# Altium PCB Hotels_Lock_Main_V1.PcbDoc (part 2 of 2)
Units mil, origin at the board's own origin, x right, y up, seen from the top; angles counter-clockwise.
Board outline 2496.06 x 2220.47 mil, 2 copper layers (Top Layer, Bottom Layer); 99 components, 77 nets, 283 pads, 104 vias.
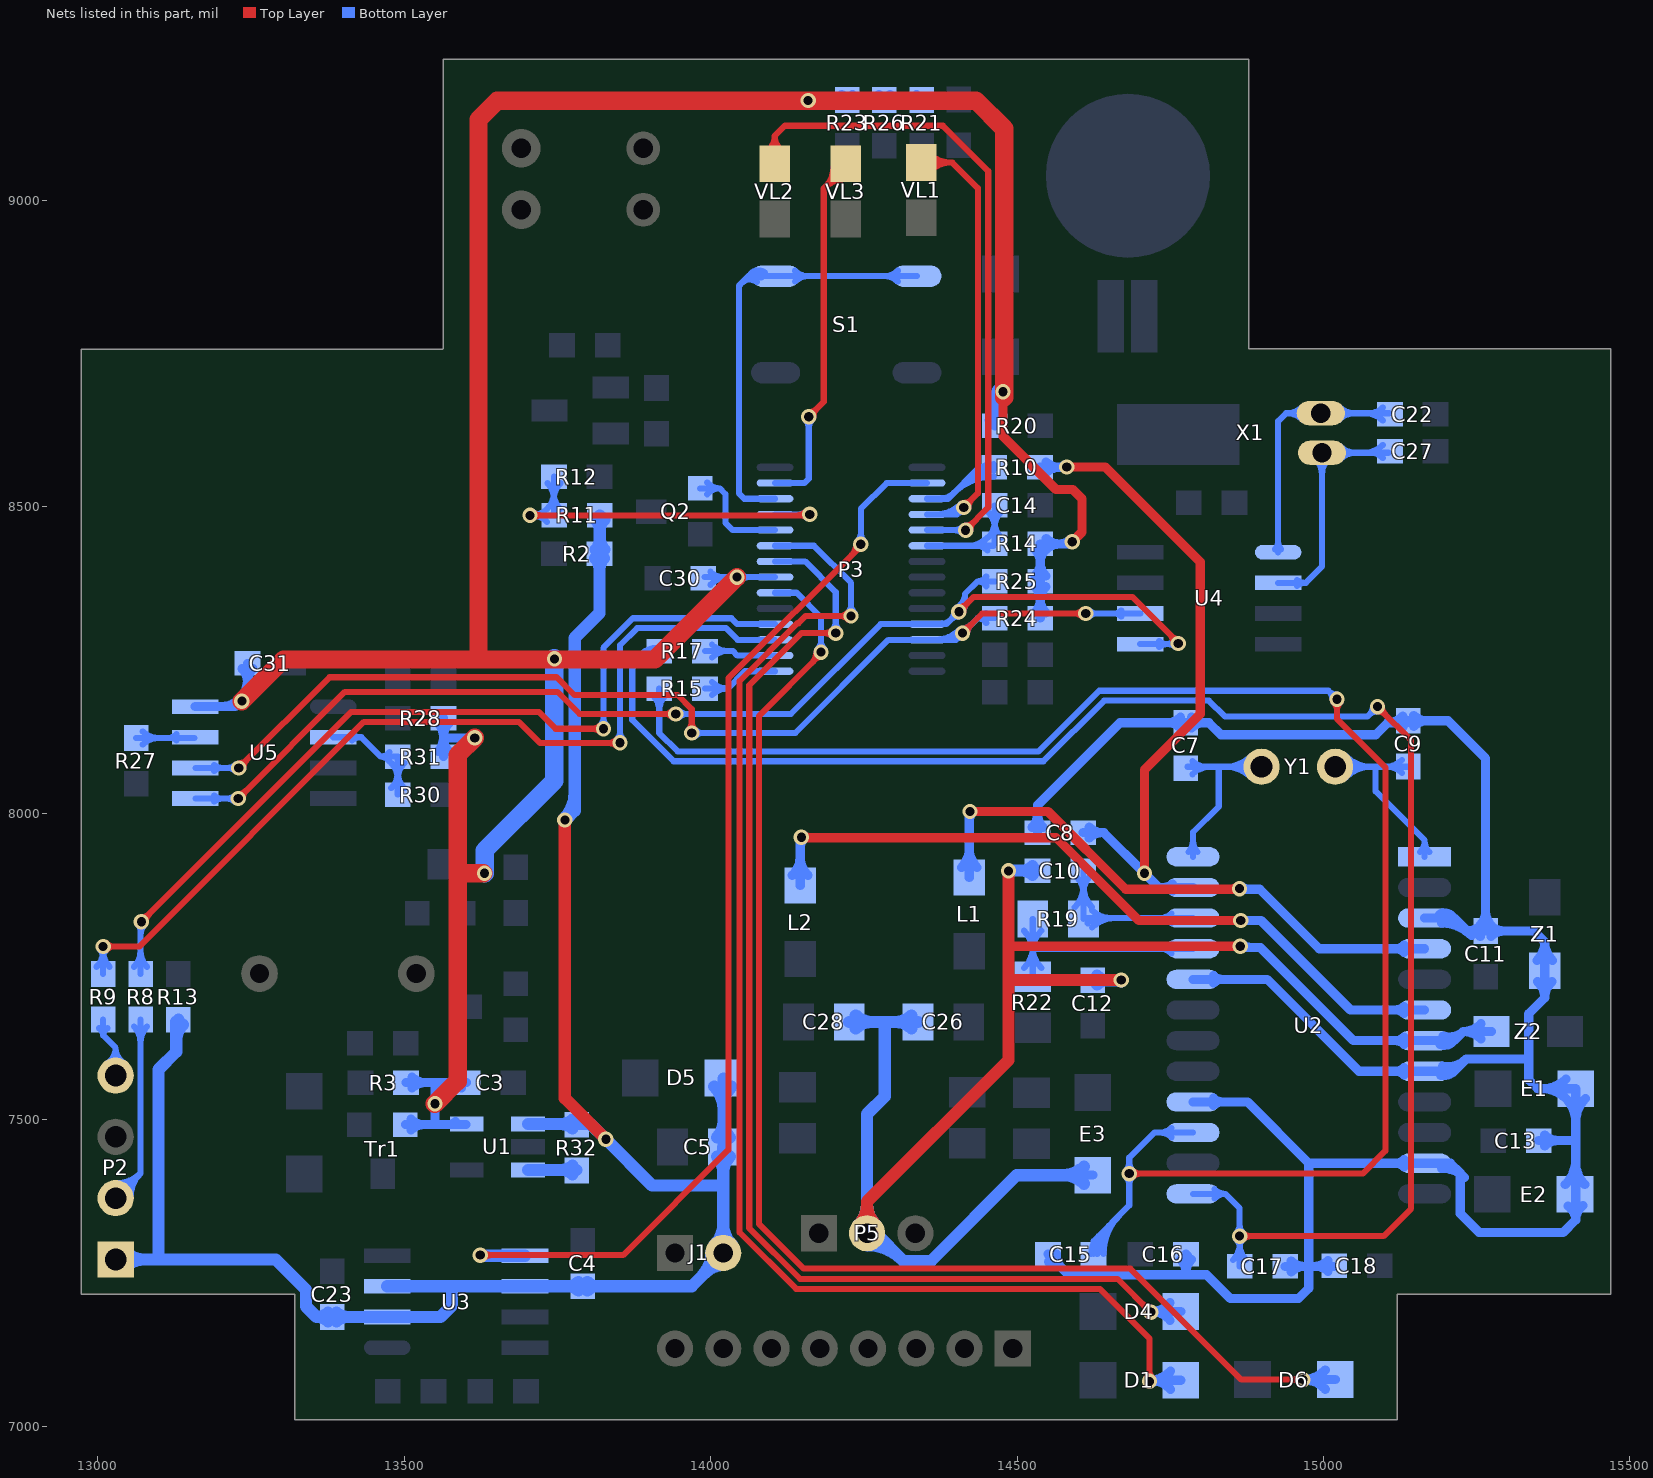
[diagram p2: the nets of this part, all layers, seen from the top]

## Via types
v1: diameter 25, hole 15, Top Layer to Bottom Layer, tented both sides, 104 vias

## Nets (pads, with @x,y where several pads share a name; then routed paths per layer and width w, separated by ;. In a path a pad name is that pad's centre, name@x,y a point inside that pad or via, vN(x,y) a via of type N, cw(c..) or ccw(c..) an arc to the next point about the centre after c; other vN are vias at no path point) (continued)
NetR30_2: R30.2 R31.2 U5.2 | length 354.4
  Bottom Layer w10: U5.2@13384,8124 13430,8124 13461.57,8092.43 ; U5.2@13414.95,8119.05 cw(c13426.9,8107.1) 13426.9,8124 cw(c13426.9,8140.9) U5.2@13414.95,8128.95 ; R31.2@13475.6,8084.58 ccw(c13461.57,8075.96) 13461.57,8092.43 ; R31.2@13475.6,8100.29 cw(c13461.57,8108.91) 13461.57,8092.43 ; R30.2@13478.78,8041.04 ccw(c13453.17,8066.65) 13489.39,8066.65 ccw(c13525.6,8066.65) R30.2@13499.99,8041.04 ; R31.2@13478.78,8081.83 cw(c13453.17,8056.22) 13489.39,8056.22 cw(c13525.6,8056.22) R31.2@13499.99,8081.83 ; R30.2@13489.39,8030.43 R31.2@13489.39,8092.43 13461.57,8092.43
NetR32_1: R32.1 U1.3 | length 116.5
  Bottom Layer w20: U1.3@13702,7418 R32.1@13780.58,7418 ; 13756.94,7418 ccw(c13756.94,7442.64) R32.1@13774.36,7425.22 ; 13757.65,7418 cw(c13757.65,7394.36) R32.1@13774.36,7411.08
NSS: P3.15 R15.2 | length 182.3
  Bottom Layer w10: R15.2@13990.61,8203.57 14027.57,8203.57 ; R15.2@14002.28,8193.01 cw(c14027.56,8167.99) 14027.56,8203.57 ; R15.2@14002.28,8214.12 ccw(c14027.56,8239.14) 14027.56,8203.57 ; P3.15@14105,8231.83 14055.83,8231.83 14027.57,8203.57
NSS1: C15.1 R15.1 U2.15 | length 3139.8
  Top Layer w10: v1(14683,7412) 15064,7412 15101,7449 15101,8075 15022,8154 v1(15022,8186) ; v1@14688.3,7406.7 cw(c14701.11,7393.89) 14701.11,7412 cw(c14701.11,7430.11) v1@14688.3,7417.3 ; v1@15016.7,8180.7 cw(c15003.89,8167.89) 15022,8167.89 cw(c15040.11,8167.89) v1@15027.3,8180.7
  Bottom Layer w10: R15.1@13905.54,8192.96 cw(c13879.93,8167.35) 13916.15,8167.35 cw(c13952.36,8167.35) R15.1@13926.75,8192.96 ; R15.1@13916.15,8203.57 13916.15,8130.85 13946,8101 14535,8101 14634,8200 15008,8200 v1(15022,8186) v1@15023,8185 ; C15.1@14620.85,7280.57 cw(c14662.59,7280.57) 14633.08,7310.08 ; C15.1@14624.85,7280.57 14624.85,7301.85 14683,7360 v1(14683,7412) 14683,7438 14724,7479 U2.15@14787.05,7479 ; C15.1@14630.85,7280.57 cw(c14696.73,7280.57) 14650.15,7327.15 ; C15.1@14640.85,7280.57 cw(c14730.88,7280.57) 14667.22,7344.22 ; v1@14677.7,7406.7 cw(c14664.89,7393.89) 14683,7393.89 cw(c14701.11,7393.89) v1@14688.3,7406.7 ; v1@14677.7,7417.3 ccw(c14664.89,7430.11) 14683,7430.11 ccw(c14701.11,7430.11) v1@14688.3,7417.3 ; U2.15@14751.89,7471.4 ccw(c14733.54,7453.05) 14733.54,7479 ccw(c14733.54,7504.95) U2.15@14751.89,7486.6 ; v1@15014.5,8186 ccw(c14996.39,8186) 15009.2,8198.8 ccw(c15022,8211.61) v1@15022,8193.5
OSCI: C22.2 U4.1 X1.2 | length 595.1
  Bottom Layer w10: U4.1@14921.05,8430.95 ccw(c14909.1,8442.9) 14926,8442.9 ccw(c14942.9,8442.9) U4.1@14930.95,8430.95 ; U4.1@14926,8426 14926,8640 14938.85,8652.85 X1.2@14995.64,8652.85 C22.2@15106.97,8652.85 ; X1.2@14965.58,8642.46 ccw(c14940.51,8617.39) 14940.51,8652.85 ccw(c14940.51,8688.3) X1.2@14965.58,8663.23 ; X1.2@15025.71,8642.46 cw(c15050.78,8617.39) 15050.78,8652.85 cw(c15050.78,8688.3) X1.2@15025.71,8663.23 ; 15067.76,8652.85 cw(c15067.76,8611.81) C22.2@15096.78,8640.83 ; 15074.58,8652.85 ccw(c15074.58,8684.24) C22.2@15096.78,8662.04
OSCIN: C9.2 U2.1 Y1.1 | length 545.1
  Bottom Layer w10: Y1.1@15019,8076 15085,8076 ; Y1.1@15029.27,8065.73 cw(c15054.07,8040.93) 15054.07,8076 cw(c15054.07,8111.07) Y1.1@15029.27,8086.27 ; Y1.1@15036.34,8058.66 cw(c15078.21,8016.79) 15078.21,8076 cw(c15078.21,8135.21) Y1.1@15036.34,8093.34 ; 15101.42,8076 ccw(c15101.42,8113.53) C9.2@15127.96,8086.99 ; 15103.28,8076 cw(c15103.28,8041.1) C9.2@15127.96,8065.78 ; C9.2@15138.18,8076 15085,8076 ; U2.1@15157.4,7936.6 ccw(c15139.05,7954.95) 15165,7954.95 ccw(c15190.95,7954.95) U2.1@15172.6,7936.6 ; U2.1@15165,7929 15165,7956 15085,8036 15085,8076
OSCO: C27.2 U4.2 X1.1 | length 571.8
  Bottom Layer w10: U4.2@14926,8376 14971,8376 14997.53,8402.53 X1.1@14997.53,8588.28 C27.2@15106.23,8588.28 ; U4.2@14956.95,8371.05 cw(c14968.9,8359.1) 14968.9,8376 cw(c14968.9,8392.9) U4.2@14956.95,8380.95 ; X1.1@14987.15,8577.9 cw(c14962.08,8552.83) 14997.53,8552.83 cw(c15032.99,8552.83) X1.1@15007.92,8577.9 ; X1.1@15027.6,8577.9 cw(c15052.67,8552.83) 15052.67,8588.28 cw(c15052.67,8623.73) X1.1@15027.6,8598.66 ; 15065.97,8588.28 ccw(c15065.97,8631.85) C27.2@15096.78,8601.04 ; 15076.37,8588.28 cw(c15076.37,8559.42) C27.2@15096.78,8579.83
OSCOUT: C7.2 U2.24 Y1.2 | length 530.9
  Bottom Layer w10: C7.2@14778.18,8076 14829,8076 ; U2.24@14779.45,7936.6 ccw(c14761.1,7954.95) 14787.05,7954.95 ccw(c14813,7954.95) U2.24@14794.65,7936.6 ; C7.2@14786.17,8063.78 cw(c14815.68,8034.28) 14815.68,8076 ; C7.2@14786.17,8084.99 ccw(c14807.88,8106.7) 14807.88,8076 ; U2.24@14787.05,7929 14787.05,7969.05 14829,8011 14829,8076 ; Y1.2@14881.66,8058.66 ccw(c14839.79,8016.79) 14839.79,8076 ccw(c14839.79,8135.21) Y1.2@14881.66,8093.34 ; Y1.2@14888.73,8065.73 ccw(c14863.93,8040.93) 14863.93,8076 ccw(c14863.93,8111.07) Y1.2@14888.73,8086.27 ; Y1.2@14899,8076 14829,8076
P0.1_NULL: P3.26 S1.1 | length 961.4
  Bottom Layer w10: 14048.35,8863.35 cw(c14075.77,8835.93) S1.1@14083.03,8874.02 ; 14050.47,8865.47 cw(c14063.77,8852.17) S1.1@14075.62,8866.77 ; 14058.31,8873.32 cw(c14070.8,8860.83) S1.1@14081.92,8874.54 ; 14061.71,8876.71 cw(c14080.05,8858.37) S1.1@14084.9,8883.85 ; 14066.16,8881.16 cw(c14077.83,8869.49) S1.1@14088.23,8882.3 ; S1.1@14072.77,8870.07 ccw(c14061.48,8863.34) 14061.48,8876.48 ; S1.1@14072.77,8882.89 cw(c14061.48,8889.62) 14061.48,8876.48 ; P3.26@14105,8513.32 14054.68,8513.32 14046,8522 14046,8861 14061.48,8876.48 ; S1.1@14137.34,8867.64 cw(c14158.68,8846.3) 14158.68,8876.48 cw(c14158.68,8906.66) S1.1@14137.34,8885.32 ; S1.1@14305.37,8867.64 ccw(c14284.03,8846.3) 14284.03,8876.48 ccw(c14284.03,8906.66) S1.1@14305.37,8885.32 ; S1.1@14336.7,8876.48 S1.1@14106,8876.48 14061.48,8876.48
P0.4_LOCKINSIDE: D1.1 P3.23 | length 2367.1
  Top Layer w10: v1@14223.7,8316.7 ccw(c14210.89,8303.89) 14210.89,8322 ccw(c14210.89,8340.11) v1@14223.7,8327.3 ; v1(14229,8322) 14155,8322 14143,8310 14141.37,8310 14047,8215.63 14047,7316.37 14139.37,7224 14635,7224 14716,7143 v1(14716,7073) ; v1@14710.7,7078.3 ccw(c14697.89,7091.11) 14716,7091.11 ccw(c14734.11,7091.11) v1@14721.3,7078.3
  Bottom Layer w10: P3.23@14105,8436.55 14168.45,8436.55 14229,8376 v1(14229,8322) ; v1@14223.7,8327.3 ccw(c14210.89,8340.11) 14229,8340.11 ccw(c14247.11,8340.11) v1@14234.3,8327.3
  Bottom Layer w15: v1@14719.54,7069.46 cw(c14732.58,7056.42) 14732.58,7074.87 ; D1.1@14750.41,7059.72 ccw(c14716.14,7028.51) v1@14716.14,7074.87 ; D1.1@14750.41,7090.02 cw(c14716.14,7121.23) v1@14716.14,7074.87 ; D1.1@14767.05,7074.87 v1@14716.13,7074.87
P0.5_LOCKALARM: D4.1 P3.22 | length 2175.5
  Top Layer w10: v1@14198.7,8288.7 ccw(c14185.89,8275.89) 14185.89,8294 ccw(c14185.89,8312.11) v1@14198.7,8299.3 ; v1(14204,8294) 14148,8294 14063,8209 14063,7323 14146,7240 14664,7240 v1(14718,7186) ; v1@14710.5,7186 ccw(c14692.39,7186) 14705.2,7198.8 ccw(c14718,7211.61) v1@14718,7193.5
  Bottom Layer w10: P3.22@14105,8410.96 14154.04,8410.96 14204,8361 v1(14204,8294) ; v1@14198.7,8299.3 ccw(c14185.89,8312.11) 14204,8312.11 ccw(c14222.11,8312.11) v1@14209.3,8299.3
  Bottom Layer w15: v1@14721.54,7182.46 cw(c14732.16,7171.84) 14732.16,7186.87 ; D4.1@14749.74,7172.5 ccw(c14719.14,7147.1) v1@14719.14,7186.87 ; D4.1@14749.74,7201.24 cw(c14719.14,7226.64) v1@14719.14,7186.87 ; D4.1@14767.05,7186.87 v1@14719.13,7186.87
P0.6_MACHINEKEY: D6.1 P3.20 | length 2380.5
  Top Layer w10: 14159.63,7257 14204,7257 ; 14165.08,8245.08 ccw(c14147.15,8263) v1@14172.5,8263 ; 14172.32,8252.32 cw(c14180,8244.64) v1@14180,8255.5 ; v1(14180,8263) 14180,8260 14079,8159 14079,7329.63 14151.63,7257 14204,7257 ; v1@14960.83,7070.56 ccw(c14948.03,7057.76) 14948.03,7075.87 ccw(c14948.03,7093.97) v1@14960.83,7081.17 ; v1(14966.13,7075.87) 14866.13,7075.87 14685,7257 14204,7257
  Bottom Layer w10: P3.20@14105,8359.78 14140.22,8359.78 14180,8320 v1(14180,8263) ; v1@14174.7,8268.3 ccw(c14161.89,8281.11) 14180,8281.11 ccw(c14198.11,8281.11) v1@14185.3,8268.3
  Bottom Layer w15: D6.1@15002.85,7060.26 ccw(c14966.14,7024.89) v1(14966.13,7075.87) ; D6.1@15002.85,7091.48 cw(c14966.14,7126.84) v1(14966.13,7075.87) ; D6.1@15019.05,7075.87 v1(14966.13,7075.87)
P1.1_RXD: P3.18 R8.1 | length 1597.1
  Top Layer w10: v1(13071,7823) 13413,8165 13720,8165 13747,8138 v1(13825,8138) ; v1@13071,7830.5 ccw(c13071,7848.61) 13083.8,7835.8 ccw(c13096.61,7823) v1@13078.5,7823 ; v1@13819.7,8132.7 ccw(c13806.89,8119.89) 13806.89,8138 ccw(c13806.89,8156.11) v1@13819.7,8143.3
  Bottom Layer w10: R8.1@13058.96,7749.46 ccw(c13033.35,7775.07) 13069.57,7775.07 ccw(c13105.78,7775.07) R8.1@13080.17,7749.46 ; v1@13065.7,7817.7 cw(c13056.36,7808.36) 13069.57,7808.36 ; R8.1@13069.57,7737.85 v1@13069.57,7821.57 ; 13069.57,7801.43 cw(c13092.57,7801.43) v1@13076.3,7817.7 ; v1@13819.7,8143.3 ccw(c13806.89,8156.11) 13825,8156.11 ccw(c13843.11,8156.11) v1@13830.3,8143.3 ; v1(13825,8138) 13825,8270 13873.19,8318.19 14033.81,8318.19 14043.4,8308.6 P3.18@14105,8308.6
P1.1_TXD: P3.17 R9.1 | length 1665.4
  Top Layer w10: v1(13008.57,7782.57) 13067.57,7782.57 13434,8149 13687,8149 13721.5,8114.5 13851.5,8114.5 v1(13852,8115) ; v1@13013.87,7777.26 cw(c13026.67,7764.46) 13026.67,7782.57 cw(c13026.67,7800.67) v1@13013.87,7787.87 ; 13832.69,8114.5 ccw(c13832.69,8134.31) v1@13846.7,8120.3 ; 13835.1,8114.5 cw(c13835.1,8098.1) v1@13846.7,8109.7
  Bottom Layer w10: R9.1@12997.96,7749.46 ccw(c12972.35,7775.07) 13008.57,7775.07 ccw(c13044.78,7775.07) R9.1@13019.17,7749.46 ; v1@13003.26,7777.26 cw(c12990.46,7764.46) 13008.57,7764.46 cw(c13026.67,7764.46) v1@13013.87,7777.26 ; R9.1@13008.57,7737.85 v1(13008.57,7782.57) ; v1@13846.7,8120.3 ccw(c13833.89,8133.11) 13852,8133.11 ccw(c13870.11,8133.11) v1@13857.3,8120.3 ; v1(13852,8115) 13858,8115 13852,8121 13852,8274.37 13879.82,8302.19 14025,8302.19 14044.18,8283.01 P3.17@14105,8283.01
PASS_FAIL: P3.5 VL2.2 | length 1211.5
  Top Layer w10: VL2.2@14092.27,9080.65 ccw(c14073.12,9105.48) 14104.49,9105.48 ; VL2.2@14104.49,9059.81 14104.49,9105.49 ; VL2.2@14116.7,9080.65 cw(c14135.85,9105.48) 14104.49,9105.48 ; v1(14416,8462) 14453,8499 14453,9048 14379,9122 14121,9122 14104.49,9105.49 ; v1@14416,8469.5 ccw(c14416,8487.61) 14428.8,8474.8 ccw(c14441.61,8462) v1@14423.5,8462
  Bottom Layer w10: P3.5@14353,8462.14 14412.86,8462.14 v1@14416,8459 ; 14397.55,8462.14 cw(c14397.55,8443.55) v1@14410.7,8456.7 ; 14398.24,8462.14 ccw(c14398.24,8479.76) v1@14410.7,8467.3
PASS_OK: P3.4 VL1.2 | length 879.2
  Top Layer w10: VL1.2@14343.49,9061.81 14394.19,9061.81 14436,9020 14436,8522 v1(14413,8499) ; VL1.2@14357.63,9047.67 cw(c14391.77,9013.52) 14391.77,9061.81 cw(c14391.77,9110.09) VL1.2@14357.63,9075.95 ; v1@14413,8506.5 ccw(c14413,8524.61) 14425.8,8511.8 ccw(c14438.61,8499) v1@14420.5,8499
  Bottom Layer w10: P3.4@14353,8487.73 14401.73,8487.73 v1(14413,8499) ; P3.4@14367.69,8487.73 ccw(c14367.69,8544.31) v1@14407.7,8504.3 ; 14391.83,8487.73 ccw(c14391.83,8520.17) v1@14414.77,8497.23
PASS_SET: P3.27 VL3.2 | length 750.5
  Top Layer w10: v1(14160,8647) 14184.49,8671.49 14184.49,9019.49 ; v1@14160,8654.5 ccw(c14160,8672.61) 14172.8,8659.8 ccw(c14185.61,8647) v1@14167.5,8647 ; 14184,9019 14184.49,9019.49 ; 14185.19,9020.19 cw(c14220.49,8984.89) VL3.2@14220.49,9034.81 ; 14186.82,9021.82 ccw(c14153.84,9054.81) VL3.2@14200.49,9054.81 ; VL3.2@14202.26,9037.26 cw(c14220.49,9019.03) VL3.2@14220.49,9044.81 ; VL3.2@14220.49,9059.81 14220.49,9055.49 14184.49,9019.49
  Bottom Layer w10: P3.27@14105,8538.91 14152.91,8538.91 14160,8546 v1(14160,8647) ; v1@14154.7,8641.7 cw(c14141.89,8628.89) 14160,8628.89 cw(c14178.11,8628.89) v1@14165.3,8641.7
POWER_TEST: P3.25 R11.2 R12.1 | length 903.4
  Top Layer w10: v1(13705,8486.11) v1@14160.11,8486.11 ; v1@13710.3,8480.81 cw(c13723.11,8468.01) 13723.11,8486.11 cw(c13723.11,8504.22) v1@13710.3,8491.42 ; 14139.71,8486.11 ccw(c14139.71,8509.75) v1@14156.43,8493.04 ; 14147.54,8486.11 cw(c14147.54,8473.54) v1@14156.43,8482.43
  Bottom Layer w10: v1@13700.11,8486.11 v1(13705,8486.11) R11.2@13744.68,8486.11 ; v1@13710.3,8480.81 cw(c13723.11,8468.01) 13723.11,8486.11 cw(c13723.11,8504.22) v1@13710.3,8491.42 ; R11.2@13733.08,8475.51 ccw(c13707.47,8449.9) 13707.47,8486.11 ccw(c13707.47,8522.33) 13733.08,8496.72 ccw(c13706.36,8523.44) 13744.15,8523.44 ; R12.1@13733.54,8538.64 cw(c13707.93,8513.03) 13744.15,8513.03 cw(c13780.36,8513.03) R12.1@13754.75,8538.64 ; R11.2@13744.15,8486.65 R12.1@13744.15,8549.24 ; 13744.15,8521.21 ccw(c13778.78,8521.21) R11.2@13754.29,8496.72 ; P3.25@14105,8487.73 v1(14161.73,8487.73) ; v1@14156.43,8482.43 ccw(c14143.63,8469.63) 14143.63,8487.73 ccw(c14143.63,8505.84) v1@14156.43,8493.04
POWER_TEST_CTRL: P3.24 Q2.1 | length 224.4
  Bottom Layer w10: Q2.1@13982.89,8530.14 14014.86,8530.14 ; Q2.1@13994.43,8520.55 cw(c14014.86,8503.56) 14014.86,8530.14 ; Q2.1@13994.43,8539.72 ccw(c14014.86,8556.71) 14014.86,8530.14 ; P3.24@14105,8462.14 14035.86,8462.14 14024,8474 14024,8521 14014.86,8530.14
RFAVSS: C10.2 C12.2 C26.1 C28.2 E3.2 P5.2 U2.7 Z2.1 | length 3413.8
  Top Layer w15: 14486,7779 14490,7783 v1(14864,7783)
  Top Layer w20: P5.2@14241.44,7328.42 ccw(c14208.1,7361.76) 14255.25,7361.76 ccw(c14302.39,7361.76) P5.2@14269.06,7328.42 ; P5.2@14255.25,7314.61 14255.25,7366.25 14486,7597 14486,7726 ; v1(14486,7906) 14486,7779 14486,7726 ; v1(14670,7728) 14488,7728 14486,7726
  Bottom Layer w15: E3.2@14605,7409.5 E3.2@14623.41,7409.5 ; v1@14866,7781 14897,7781 15049,7629 U2.7@15165,7629 15213,7629 15228,7644 ; v1@14867.54,7786.54 ccw(c14880.9,7799.9) 14880.9,7781 ; U2.7@15131.61,7623.17 ccw(c15117.53,7609.09) 15117.53,7629 ccw(c15117.53,7648.91) U2.7@15131.61,7634.83 ; U2.7@15190.25,7622.65 ccw(c15197.12,7641.55) 15211.34,7627.34 ; U2.7@15195.37,7636.75 ccw(c15205.99,7666) 15228,7644 ; U2.7@15198.39,7623.17 cw(c15212.47,7609.09) 15212.47,7629 cw(c15212.47,7648.91) U2.7@15198.39,7634.83 ; Z2.1@15256.93,7631.56 ccw(c15228,7604.15) 15228,7644 ; Z2.1@15256.93,7656.44 cw(c15228,7683.85) 15228,7644 ; Z2.1@15274,7644 15228,7644
  Bottom Layer w20: C28.2@14226.28,7659.51 14284,7659.51 ; C28.2@14236.89,7648.91 cw(c14262.49,7623.3) 14262.49,7659.51 cw(c14262.49,7695.73) C28.2@14236.89,7670.12 ; P5.2@14241.44,7328.42 ccw(c14208.1,7361.76) 14255.25,7361.76 ccw(c14302.39,7361.76) P5.2@14269.06,7328.42 ; P5.2@14255.25,7295.09 cw(c14255.25,7213.29) 14313.09,7271.13 ; C26.1@14327.67,7648.91 ccw(c14302.07,7623.3) 14302.07,7659.51 ccw(c14302.07,7695.73) C26.1@14327.67,7670.12 ; C26.1@14338.28,7659.51 14284,7659.51 ; v1@14487.43,7906.43 C10.2@14533.39,7906.43 ; C10.2@14525.31,7899.36 ccw(c14508.24,7882.29) 14508.24,7906.43 ccw(c14508.24,7930.58) C10.2@14525.31,7913.51 ; E3.2@14605,7409.5 14499.5,7409.5 14359.09,7269.09 14315.13,7269.09 14269.6,7314.61 P5.2@14255.25,7314.61 14255.25,7509.25 14284,7538 14284,7659.51 ; E3.2@14609.27,7395.36 ccw(c14575.13,7361.21) 14575.13,7409.5 ccw(c14575.13,7457.78) E3.2@14609.27,7423.64 ; C12.2@14623.43,7727.61 14668.39,7727.61 v1@14670,7726 ; C12.2@14630.51,7720.54 cw(c14647.58,7703.47) 14647.58,7727.61 cw(c14647.58,7751.76) C12.2@14630.51,7734.69
RFDVSS: C7.1 C8.2 C9.1 C11.1 C13.1 C15.2 C16.2 C17.2 C18.2 E1.2 E2.2 U2.3 U2.8 U2.11 U2.16 U2.20 Z1.1 | length 5671.6
  Bottom Layer w15: C8.2@14524.55,7977.27 ccw(c14503.21,7998.61) 14533.39,7998.61 ccw(c14563.56,7998.61) C8.2@14542.22,7977.27 ; C8.2@14533.39,7968.43 14533.39,8013.39 14667.85,8147.85 C7.1@14775.57,8147.85 14813,8147.85 14832.85,8128 15085.15,8128 15105,8147.85 ; C15.2@14550.39,7280.57 14583.89,7247.07 14775,7247.07 ; C15.2@14551.39,7268.07 cw(c14551.39,7240.3) 14571.02,7259.93 ; C15.2@14563.89,7280.57 ccw(c14596.48,7280.57) 14573.43,7257.52 ; C7.1@14766.73,8139.01 ccw(c14745.39,8117.68) 14745.39,8147.85 ccw(c14745.39,8178.03) C7.1@14766.73,8156.69 ; C16.2@14766.78,7271.73 cw(c14745.44,7250.39) 14775.61,7250.39 cw(c14805.79,7250.39) C16.2@14784.45,7271.73 ; C16.2@14778,7278.18 C16.2@14775.61,7280.57 14775.61,7247.68 14775,7247.07 ; C7.1@14784.4,8139.01 cw(c14805.74,8117.68) 14805.74,8147.85 cw(c14805.74,8178.03) C7.1@14784.4,8156.69 ; U2.16@14787.05,7529 14876,7529 14976,7429 ; U2.20@14787.05,7729 14908,7729 15058,7579 U2.8@15165,7579 15213,7579 15233,7599 ; U2.16@14820.44,7523.17 cw(c14834.52,7509.09) 14834.52,7529 cw(c14834.52,7548.91) U2.16@14820.44,7534.83 ; U2.20@14820.44,7723.17 cw(c14834.52,7709.09) 14834.52,7729 cw(c14834.52,7748.91) U2.20@14820.44,7734.83 ; C17.2@14937.61,7260.57 14976,7260.57 ; C17.2@14947.45,7251.73 cw(c14968.79,7230.39) 14968.79,7260.57 cw(c14968.79,7290.74) C17.2@14947.45,7269.4 ; 14984.11,7260.57 ccw(c14984.11,7293.71) C18.2@15007.55,7270.27 ; 14988.31,7260.57 cw(c14988.31,7233.36) C18.2@15007.55,7252.6 ; C18.2@15016.52,7260.57 14976,7260.57 ; C9.1@15129.46,8158.42 cw(c15105,8181.45) 15105,8147.85 ; U2.11@15131.61,7423.17 ccw(c15117.53,7409.09) 15117.53,7429 ccw(c15117.53,7448.91) U2.11@15131.61,7434.83 ; U2.8@15131.61,7573.17 ccw(c15117.53,7559.09) 15117.53,7579 ccw(c15117.53,7598.91) U2.8@15131.61,7584.83 ; C9.1@15135.57,8147.85 15112,8147.85 ; C9.1@15138.57,8150.85 15203.15,8150.85 15264.57,8089.43 C11.1@15264.57,7807.85 ; C9.1@15147.4,8142.01 cw(c15168.74,8120.68) 15168.74,8150.85 cw(c15168.74,8181.03) C9.1@15147.4,8159.69 ; U2.3@15165,7829 15213,7829 15234.15,7807.85 C11.1@15264.57,7807.85 ; U2.3@15189.05,7834.77 cw(c15197.8,7820.37) 15209.71,7832.29 ; U2.8@15191.28,7572.37 ccw(c15195.88,7596.18) 15213.03,7579.03 ; U2.3@15192.56,7820.75 cw(c15192.56,7751.49) 15241.53,7800.47 ; U2.3@15192.56,7835.75 cw(c15192.56,7802.7) 15215.93,7826.07 ; U2.11@15192.76,7420.75 cw(c15194.03,7369.59) 15230.22,7405.78 ; U2.8@15194.13,7587.1 ccw(c15202.36,7629.64) 15233,7599 ; U2.3@15196.84,7821.95 cw(c15208.01,7803.57) 15223.22,7818.78 ; U2.8@15198.39,7573.17 cw(c15212.47,7559.09) 15212.47,7579 cw(c15212.47,7598.91) U2.8@15198.39,7584.83 ; U2.3@15198.39,7823.17 cw(c15212.47,7809.09) 15212.47,7829 cw(c15212.47,7848.91) U2.3@15198.39,7834.83 ; C11.1@15255.73,7799.01 ccw(c15234.39,7777.68) 15234.39,7807.85 ccw(c15234.39,7838.03) C11.1@15255.73,7816.69 ; C11.1@15255.73,7817.69 ccw(c15234.39,7839.03) 15264.57,7839.03 ccw(c15294.74,7839.03) C11.1@15273.4,7817.69 ; C11.1@15273.4,7799.01 cw(c15294.74,7777.68) 15294.74,7807.85 cw(c15294.74,7838.03) C11.1@15273.4,7816.69 ; Z1.1@15348.34,7759.86 ccw(c15318.8,7790) 15361,7790 ; Z1.1@15349.04,7725.49 cw(c15325.69,7699) 15361,7699 ; C13.1@15351.3,7465.99 15411.49,7465.99 ; C13.1@15361.14,7457.15 cw(c15382.47,7435.81) 15382.47,7465.99 cw(c15382.47,7496.17) C13.1@15361.14,7474.83 ; Z1.1@15372.96,7725.49 ccw(c15396.31,7699) 15361,7699 ; Z1.1@15373.66,7759.86 cw(c15403.2,7790) 15361,7790 ; E2.2@15394.59,7394.32 ccw(c15353.77,7435.15) 15411.5,7435.15 ; E1.2@15395.59,7566.32 cw(c15357.18,7604.73) 15357.18,7550.41 cw(c15357.18,7496.09) 15395.59,7534.5 cw(c15357.18,7496.09) 15411.5,7496.09 cw(c15465.82,7496.09) E1.2@15427.41,7534.5 ; E2.2@15398.76,7359.22 cw(c15384.86,7336.49) 15411.5,7336.49 ; 15411.5,7430.32 ccw(c15462.41,7430.32) E2.2@15426.41,7394.32 ; E2.2@15423.63,7360.14 ccw(c15440.62,7336.49) 15411.5,7336.49 ; 14775,7247.07 14809.11,7247.07 14848.18,7208 14959,7208 14976,7225 14976,7260.57 ; 14976,7260.57 14976,7429 ; 14976,7429 U2.11@15165,7429 15207,7429 15223,7413 15223,7347 15254,7316 15391,7316 15411.5,7336.5 ; 15105,8147.85 15112,8147.85 ; 15112,8147.85 ccw(c15112,8166.94) 15128.05,8156.61 cw(c15112,8166.94) 15112,8147.85 ; 15113.22,8147.85 cw(c15113.22,8124.5) C9.1@15129.73,8141.01 ; 15113.22,8147.85 cw(c15113.22,8124.5) C9.1@15129.73,8141.01 ; 15113.22,8147.85 cw(c15113.22,8124.5) C9.1@15129.73,8141.01 ; 15233,7599 15335,7599 ; C11.1@15264.57,7807.85 15343.15,7807.85 15361,7790 ; 15335,7599 15335,7565 15349.59,7550.41 E1.2@15411.5,7550.41 15411.5,7336.5 ; 15335,7599 15335,7673 15361,7699 ; 15361,7699 Z1.1@15361,7743 15361,7790
RIN: P3.2 U3.5 | length 1891.5
  Top Layer w10: v1(13624,7279) 13857,7279 14029,7451 14029,8220.25 v1@14244.87,8436.13 ; v1@13629.3,7273.7 cw(c13642.11,7260.89) 13642.11,7279 cw(c13642.11,7297.11) v1@13629.3,7284.3 ; 14230.26,8421.51 ccw(c14212.77,8439) v1@14237.5,8439 ; 14236.88,8428.14 cw(c14245,8420.02) v1@14245,8431.5
  Bottom Layer w10: v1@14239.7,8444.3 ccw(c14226.89,8457.11) 14245,8457.11 ccw(c14263.11,8457.11) v1@14250.3,8444.3 ; v1(14245,8439) 14245,8497 14286.91,8538.91 P3.2@14353,8538.91
  Bottom Layer w20: v1@13625,7278 U3.5@13697,7278
RST: C14.2 P3.6 R14.2 | length 342.1
  Bottom Layer w10: P3.6@14353,8436.55 R14.2@14461.5,8436.55 ; 14419.21,8436.55 ccw(c14419.21,8482.61) R14.2@14451.78,8450.04 ; 14433.13,8436.55 cw(c14433.13,8410.18) R14.2@14451.78,8428.83 ; C14.2@14452.72,8491.83 cw(c14426.97,8466.08) 14463.39,8466.08 ; R14.2@14452.78,8450.04 ccw(c14427.17,8475.65) 14463.39,8475.65 ccw(c14499.6,8475.65) R14.2@14473.99,8450.04 ; R14.2@14463.39,8439.43 C14.2@14463.39,8502.38 ; 14463.39,8466.36 cw(c14499.4,8466.36) C14.2@14473.93,8491.83
RST1: P3.3 R10.1 | length 313.1
  Bottom Layer w10: P3.3@14353,8513.32 14387.32,8513.32 14438.57,8564.57 R10.1@14462.85,8564.57 ; P3.3@14377.09,8514.23 ccw(c14377.09,8541.11) 14396.1,8522.1 ; 14396.5,8522.5 cw(c14461.85,8457.14) R10.1@14461.85,8549.57 ; 14413.57,8539.57 cw(c14461.85,8491.29) R10.1@14461.85,8559.57 ; 14430.64,8556.64 cw(c14461.85,8525.43) R10.1@14461.85,8569.57
RSTPD: C8.1 R10.2 U2.23 | length 1224.1
  Top Layer w15: v1(14581,8565) 14644,8565 14799,8410 14799,8162 14708,8071 v1(14708,7902)
  Bottom Layer w15: R10.2@14537.32,8564.57 v1@14580.57,8564.57 ; R10.2@14547.15,8555.73 cw(c14568.49,8534.39) 14568.49,8564.57 cw(c14568.49,8594.74) R10.2@14547.15,8573.4 ; 14567.88,8564.57 ccw(c14567.88,8578.12) v1@14577.46,8568.54 ; C8.1@14607.85,7968.43 14641.57,7968.43 v1(14708,7902) 14731,7879 U2.23@14787.05,7879 ; C8.1@14617.69,7959.6 cw(c14639.03,7938.26) 14639.03,7968.43 cw(c14639.03,7998.61) C8.1@14617.69,7977.27 ; U2.23@14753.66,7873.17 ccw(c14739.58,7859.09) 14739.58,7879 ccw(c14739.58,7898.91) U2.23@14753.66,7884.83
RX: R19.1 R22.2 U2.21 | length 547
  Bottom Layer w10: R19.1@14511.14,7808.37 cw(c14476.49,7773.72) 14525.49,7773.72 ; R22.2@14511.35,7747.42 ccw(c14477.2,7781.56) 14525.49,7781.56 ccw(c14573.77,7781.56) R22.2@14539.63,7747.42 ; R22.2@14525.49,7733.28 R19.1@14525.49,7827.3 ; 14525.49,7774.73 cw(c14573.06,7774.73) R19.1@14539.42,7808.37 ; 14526.49,7779 U2.21@14787.05,7779 ; U2.21@14751.89,7771.4 ccw(c14733.54,7753.05) 14733.54,7779 ccw(c14733.54,7804.95) U2.21@14751.89,7786.6
RXD_ISP: P2.2 R8.2 | length 506.1
  Bottom Layer w10: P2.2@13029,7372 13069.57,7412.57 ; P2.2@13029.33,7386.52 ccw(c13030.07,7418.98) 13053.03,7396.03 ccw(c13075.98,7373.07) P2.2@13043.52,7372.33 ; P2.2@13029.56,7396.52 ccw(c13030.8,7451.33) 13069.56,7412.56 ; P2.2@13053.52,7372.56 cw(c13108.33,7373.8) 13069.56,7412.56 ; R8.2@13058.96,7651.78 cw(c13033.35,7626.17) 13069.57,7626.17 cw(c13105.78,7626.17) R8.2@13080.17,7651.78 ; R8.2@13069.57,7663.39 13069.57,7412.57
SCK: P3.16 R17.2 | length 174.6
  Bottom Layer w10: R17.2@13990.61,8264.57 13991.05,8265 14036,8265 14043.58,8257.42 P3.16@14105,8257.42 ; R17.2@14002.22,8253.96 cw(c14028.88,8227.3) 14028.88,8265 ; R17.2@14002.22,8275.17 ccw(c14026.78,8299.73) 14026.78,8265
SCK1: C17.1 R17.1 U2.13 | length 3080.8
  Top Layer w10: v1(14863.15,7310) 15098,7310 15143,7355 15143,8119 15092,8170 15090,8170 15088,8172 v1(15088,8174) ; v1@14868.45,7304.7 cw(c14881.25,7291.89) 14881.25,7310 cw(c14881.25,7328.11) v1@14868.45,7315.3 ; v1@15088,8166.5 cw(c15088,8148.39) 15100.8,8161.2 cw(c15113.61,8174) v1@15095.5,8174
  Bottom Layer w10: 13874.64,8246.64 cw(c13907.3,8213.99) R17.1@13914.38,8259.62 ; 13888.58,8260.58 cw(c13911.04,8238.11) R17.1@13915.91,8269.51 ; R17.1@13916.15,8264.57 13892.57,8264.57 13872,8244 13872,8152.37 13939.37,8085 14543,8085 14642,8184 14813,8184 14839,8158 15072,8158 v1(15088,8174) ; U2.13@14787.05,7379 14840,7379 ; U2.13@14822.32,7371.52 cw(c14840,7354.38) 14840,7379 ; U2.13@14822.32,7386.48 ccw(c14840,7403.62) 14840,7379 ; C17.1@14852.54,7271.17 ccw(c14826.93,7296.78) 14863.15,7296.78 ccw(c14899.36,7296.78) C17.1@14873.75,7271.17 ; v1@14857.84,7304.7 cw(c14845.04,7291.89) 14863.15,7291.89 cw(c14881.25,7291.89) v1@14868.45,7304.7 ; v1@14857.84,7315.3 ccw(c14845.04,7328.11) 14863.15,7328.11 ccw(c14881.25,7328.11) v1@14868.45,7315.3 ; C17.1@14863.15,7260.57 v1(14863.15,7310) 14863.15,7355.85 14840,7379 ; v1@15080.5,8174 cw(c15062.39,8174) 15075.2,8161.2 cw(c15088,8148.39) v1@15088,8166.5
SCL: P3.12 R24.2 U4.6 U5.6 | length 2191.2
  Top Layer w10: v1(13230,8074) 13378,8222 13748.63,8222 13777.63,8193 13946,8193 13969,8170 v1(13969,8131) ; v1@13230,8081.5 ccw(c13230,8099.61) 13242.8,8086.8 ccw(c13255.61,8074) v1@13237.5,8074 ; v1@13963.7,8136.3 ccw(c13950.89,8149.11) 13969,8149.11 ccw(c13987.11,8149.11) v1@13974.3,8136.3 ; v1(14411.02,8294.02) 14443,8326 v1(14612,8326) ; v1@14411.02,8301.52 ccw(c14411.02,8319.63) 14423.82,8306.82 ccw(c14436.63,8294.02) v1@14418.52,8294.02 ; v1@14606.7,8320.7 ccw(c14593.89,8307.89) 14593.89,8326 ccw(c14593.89,8344.11) v1@14606.7,8331.3
  Bottom Layer w10: U5.6@13159,8074 v1(13230,8074) ; U5.6@13189.95,8069.05 cw(c13201.9,8057.1) 13201.9,8074 cw(c13201.9,8090.9) U5.6@13189.95,8078.95 ; v1@13224.7,8068.7 ccw(c13211.89,8055.89) 13211.89,8074 ccw(c13211.89,8092.11) v1@13224.7,8079.3 ; v1(13969,8131) 14138,8131 14290.01,8283.01 P3.12@14353,8283.01 14400.01,8283.01 v1(14411.02,8294.02) 14435.43,8318.43 ; v1@13974.3,8125.7 cw(c13987.11,8112.89) 13987.11,8131 cw(c13987.11,8149.11) v1@13974.3,8136.3 ; P3.12@14366.33,8283.01 ccw(c14366.33,8338.71) v1@14405.72,8299.32 ; 14390.47,8283.01 ccw(c14390.47,8314.57) v1@14412.79,8292.25 ; v1@14411.02,8301.52 ccw(c14411.02,8319.63) 14423.82,8306.82 ccw(c14436.63,8294.02) v1@14418.52,8294.02 ; R24.2@14449.64,8310.53 ccw(c14435.44,8301.73) 14435.44,8318.43 ; R24.2@14449.64,8326.34 cw(c14435.44,8335.14) 14435.44,8318.43 ; R24.2@14464.39,8318.43 R24.2@14463.39,8318.43 14435.43,8318.43 ; v1(14612,8326) U4.6@14701,8326 ; v1@14617.3,8320.7 cw(c14630.11,8307.89) 14630.11,8326 cw(c14630.11,8344.11) v1@14617.3,8331.3 ; U4.6@14670.05,8321.05 ccw(c14658.1,8309.1) 14658.1,8326 ccw(c14658.1,8342.9) U4.6@14670.05,8330.95
SDA: P3.11 R25.2 U4.5 U5.5 | length 2329.1
  Top Layer w10: v1(13229,8024) 13403,8198 13750,8198 13786,8162 v1(13943,8162) ; v1@13229,8031.5 ccw(c13229,8049.61) 13241.8,8036.8 ccw(c13254.61,8024) v1@13236.5,8024 ; v1@13937.7,8156.7 ccw(c13924.89,8143.89) 13924.89,8162 ccw(c13924.89,8180.11) v1@13937.7,8167.3 ; v1(14405,8329) 14429,8353 14688,8353 v1@14763,8278 ; v1@14405,8336.5 ccw(c14405,8354.61) 14417.8,8341.8 ccw(c14430.61,8329) v1@14412.5,8329 ; 14749.49,8291.51 cw(c14734.98,8277) v1@14755.5,8277 ; 14751.9,8289.1 ccw(c14763,8300.19) v1@14763,8284.5
  Bottom Layer w10: U5.5@13159,8024 v1(13229,8024) ; U5.5@13189.95,8019.05 cw(c13201.9,8007.1) 13201.9,8024 cw(c13201.9,8040.9) U5.5@13189.95,8028.95 ; v1@13223.7,8018.7 ccw(c13210.89,8005.89) 13210.89,8024 ccw(c13210.89,8042.11) v1@13223.7,8029.3 ; v1(13943,8162) 14131,8162 14277.6,8308.6 P3.11@14353,8308.6 14384.6,8308.6 v1(14405,8329) 14415,8339 14415,8358 ; v1@13948.3,8156.7 cw(c13961.11,8143.89) 13961.11,8162 cw(c13961.11,8180.11) v1@13948.3,8167.3 ; P3.11@14377.09,8309.5 ccw(c14377.09,8329.81) 14391.45,8315.45 ; v1@14397.5,8329 cw(c14379.39,8329) 14392.2,8316.2 cw(c14405,8303.39) v1@14405,8321.5 ; v1@14401.5,8335.64 ccw(c14389.72,8358) 14415,8358 ; v1@14406.17,8326.79 ccw(c14398.45,8341.43) 14415,8341.43 ; R25.2@14449.64,8370.53 ccw(c14435.44,8361.73) 14435.44,8378.43 ; R25.2@14449.64,8386.34 cw(c14435.44,8395.14) 14435.44,8378.43 ; R25.2@14464.39,8378.43 R25.2@14463.39,8378.43 14435.43,8378.43 ; U4.5@14701,8276 v1@14762,8276 ; U4.5@14731.95,8271.05 cw(c14743.9,8259.1) 14743.9,8276 cw(c14743.9,8292.9) U4.5@14731.95,8280.95 ; 14742.48,8276 ccw(c14742.48,8297.52) v1@14757.7,8282.3 ; 14747.31,8276 cw(c14747.31,8261.31) v1@14757.7,8271.7 ; 14415,8358 14435.43,8378.43
  other v1: 14763,8277
TX1: L1.1 U2.4 | length 1080.6
  Top Layer w15: v1(14423,8003) 14550.38,8003 14677.38,7876 14862,7876 v1(14863,7877) ; 14848.51,7876 ccw(c14848.51,7891.49) v1@14859.46,7880.54
  Bottom Layer w15: L1.1@14409.21,7911.73 ccw(c14378.33,7942.61) 14422,7942.61 ccw(c14465.67,7942.61) L1.1@14434.79,7911.73 ; L1.1@14422,7895 v1@14422,8002 ; 14422,7988.51 cw(c14437.49,7988.51) v1@14426.54,7999.46 ; v1@14861,7876 14896,7876 14993,7779 U2.4@15165,7779 ; v1@14866.54,7880.54 ccw(c14877.49,7891.49) 14877.49,7876 ; U2.4@15131.61,7773.17 ccw(c15117.53,7759.09) 15117.53,7779 ccw(c15117.53,7798.91) U2.4@15131.61,7784.83
TX2: L2.1 U2.6 | length 1341.3
  Top Layer w15: v1@14146,7960 14563.68,7960 14698.68,7825 v1(14865,7825) ; v1@14151.54,7964.54 ccw(c14162.49,7975.49) 14162.49,7960
  Bottom Layer w15: L2.1@14133.21,7898.73 ccw(c14102.33,7929.61) 14146,7929.61 ccw(c14189.67,7929.61) L2.1@14158.79,7898.73 ; L2.1@14146,7882 v1@14146,7959 ; 14146,7944.1 cw(c14164.9,7944.1) v1@14151.54,7957.46 ; v1@14863,7825 v1(14865,7825) 14898,7825 15044,7679 U2.6@15165,7679 ; U2.6@15131.61,7673.17 ccw(c15117.53,7659.09) 15117.53,7679 ccw(c15117.53,7698.91) U2.6@15131.61,7684.83
  other v1: 14148,7961
TXD_ISP: P2.4 R9.2 | length 215.1
  Bottom Layer w10: R9.2@13008.57,7663.39 13008.57,7637.43 ; P2.4@13015.71,7592.61 ccw(c12999.99,7617) 13029,7617 ; P2.4@13029,7572 13029,7617 ; P2.4@13042.29,7592.61 cw(c13058.01,7617) 13029,7617 ; 13008.57,7637.44 cw(c13021.82,7637.44) 13015.6,7649.14 ccw(c13021.82,7637.44) 13008.57,7637.44 ; 13008.57,7637.44 ccw(c12995.32,7637.44) 13001.53,7649.14 cw(c12995.32,7637.44) 13008.57,7637.44 ; 13008.57,7637.43 13029,7617
VDD: C3.1 C30.1 C31.1 P3.21 R3.1 R14.1 R20.2 R21.1 R23.1 R24.1 R25.1 R26.1 R28.1 R31.1 Tr1.2 U1.5 U5.8 | length 6664.8
  Top Layer w15: v1(13550,7526) v1@13550,7528 ; v1(14477,8688) 14477,8615 14563.57,8528.43 14590.77,8528.43 14606,8513.2 14606,8459 v1(14590,8443)
  Top Layer w30: v1(13235,8183) 13303,8251 13621,8251 ; v1(13550,7526) 13587,7563 13587,7902 ; v1(13615,8123) 13587,8095 13587,7902 ; v1@13629,7902 13587,7902 ; v1(14043,8385.37) 13908.63,8251 13621,8251 ; v1@14479,8679 14479,9117 14433,9163 v1(14159,9163) 13652,9163 13621,9132 13621,8251
  Bottom Layer w10: C30.1@13989.79,8385.37 v1(14043,8385.37) P3.21@14105,8385.37 ; C30.1@13999.46,8372.83 cw(c14029.74,8342.55) 14029.74,8385.37 ; C30.1@13999.46,8394.04 ccw(c14020.4,8414.98) 14020.4,8385.37 ; v1@14037.7,8380.07 ccw(c14024.89,8367.26) 14024.89,8385.37 ccw(c14024.89,8403.48) v1@14037.7,8390.67 ; v1@14048.3,8380.07 cw(c14061.11,8367.26) 14061.11,8385.37 cw(c14061.11,8403.48) v1@14048.3,8390.67
  Bottom Layer w15: U5.8@13159,8174 13224,8174 13244.15,8194.15 C31.1@13244.15,8244.57 ; 13201.2,8174 ccw(c13201.2,8216.8) 13231.46,8186.54 ccw(c13200.85,8217.15) 13244.15,8217.15 ; C31.1@13235.31,8235.73 cw(c13213.97,8214.39) 13244.15,8214.39 cw(c13274.32,8214.39) C31.1@13252.99,8235.73 ; Tr1.2@13501.87,7491.89 13550,7491.89 ; R3.1@13502.85,7560.43 13550,7560.43 ; Tr1.2@13510.7,7483.05 cw(c13532.04,7461.71) 13532.04,7491.89 cw(c13532.04,7522.07) Tr1.2@13510.7,7500.73 ; R3.1@13512.69,7551.6 cw(c13534.03,7530.26) 13534.03,7560.43 cw(c13534.03,7590.61) R3.1@13512.69,7569.27 ; R31.1@13555.01,8101.27 ccw(c13533.68,8122.61) 13563.85,8122.61 ccw(c13594.03,8122.61) R31.1@13572.69,8101.27 ; R28.1@13555.01,8146.6 cw(c13533.68,8125.26) 13563.85,8125.26 cw(c13594.03,8125.26) R28.1@13572.69,8146.6 ; R31.1@13563.85,8092.43 13563.85,8123 ; R28.1@13563.85,8155.43 13563.85,8123 ; 13572.25,7491.89 ccw(c13572.25,7507.75) U1.5@13583.46,7496.54 ; C3.1@13593.31,7551.6 ccw(c13571.97,7530.26) 13571.97,7560.43 ccw(c13571.97,7590.61) C3.1@13593.31,7569.27 ; U1.5@13600.89,7491.89 13550,7491.89 ; C3.1@13601.28,7560.43 13550,7560.43 ; v1@13616,8122 v1(13615,8123) 13563.85,8123 ; v1@14159.85,9163.85 R23.1@14222.57,9163.85 R26.1@14283.57,9163.85 R21.1@14344.57,9163.85 ; v1@14162.54,9159.46 cw(c14173.13,9148.87) 14173.13,9163.85 ; R23.1@14213.73,9155.01 ccw(c14192.39,9133.68) 14192.39,9163.85 ccw(c14192.39,9194.03) R23.1@14213.73,9172.69 ; R23.1@14231.4,9155.01 cw(c14252.74,9133.68) 14252.74,9163.85 cw(c14252.74,9194.03) R23.1@14231.4,9172.69 ; R26.1@14274.73,9155.01 ccw(c14253.39,9133.68) 14253.39,9163.85 ccw(c14253.39,9194.03) R26.1@14274.73,9172.69 ; R26.1@14292.4,9155.01 cw(c14313.74,9133.68) 14313.74,9163.85 cw(c14313.74,9194.03) R26.1@14292.4,9172.69 ; R21.1@14335.73,9155.01 ccw(c14314.39,9133.68) 14314.39,9163.85 ccw(c14314.39,9194.03) R21.1@14335.73,9172.69 ; R20.2@14454.55,8641.27 ccw(c14433.21,8662.61) 14463.39,8662.61 ccw(c14493.56,8662.61) R20.2@14472.22,8641.27 ; R20.2@14463.39,8632.43 14463.39,8674.39 v1(14477,8688) ; R20.2@14463.39,8643.06 cw(c14521.94,8643.06) v1@14480.54,8684.46 ; 14463.39,8668.75 cw(c14477.65,8668.75) v1@14477.17,8683 ; 14463.39,8679.27 cw(c14485.73,8679.27) v1@14469.93,8695.07 ; R24.1@14529.01,8327.27 ccw(c14507.68,8348.61) 14537.85,8348.61 ccw(c14568.03,8348.61) R24.1@14546.69,8327.27 ; R25.1@14529.01,8369.6 cw(c14507.68,8348.26) 14537.85,8348.26 cw(c14568.03,8348.26) R25.1@14546.69,8369.6 ; R25.1@14529.01,8387.27 ccw(c14507.68,8408.61) 14537.85,8408.61 ccw(c14568.03,8408.61) R25.1@14546.69,8387.27 ; R14.1@14529.01,8430.6 cw(c14507.68,8409.26) 14537.85,8409.26 cw(c14568.03,8409.26) R14.1@14546.69,8430.6 ; R24.1@14537.85,8318.43 R25.1@14537.85,8378.43 R14.1@14537.85,8439.43 14590.43,8439.43 v1@14591,8440 ; R14.1@14547.69,8430.6 cw(c14569.03,8409.26) 14569.03,8439.43 cw(c14569.03,8469.61) R14.1@14547.69,8448.27 ; 14569.32,8439.43 ccw(c14569.32,8463.68) v1@14586.46,8446.54 ; 13550,7491.89 v1(13550,7526) 13550,7560.43
  Bottom Layer w30: v1(13631,7902) 13631,7939.14 13745,8053.14 v1(13745,8252) v1@13745,8253
VIN: C4.1 C5.1 C23.1 D5.2 J1.2 P2.1 R2.2 R11.1 R13.1 R32.2 U1.1 U3.2 U3.3 U3.6 | length 4150.4
  Top Layer w20: v1(13762,7989) 13762,7535 v1(13829,7468)
  Bottom Layer w20: P2.1@13029,7272 13099,7272 ; P2.1@13042.81,7258.19 cw(c13076.14,7224.86) 13076.14,7272 cw(c13076.14,7319.14) P2.1@13042.81,7285.81 ; 13128,7629.71 cw(c13163.87,7629.71) R13.1@13138.51,7655.08 ; R13.1@13131.43,7663.15 13128,7659.71 13128,7611 13099,7582 13099,7272 ; C23.1@13375.36,7171.08 ccw(c13358.29,7154) 13358.29,7178.15 ccw(c13358.29,7202.29) C23.1@13375.36,7185.22 ; C23.1@13389.51,7171.08 cw(c13406.58,7154) 13406.58,7178.15 cw(c13406.58,7202.29) C23.1@13389.51,7185.22 ; U3.3@13472,7228 13578,7228 ; U1.1@13702,7493 13804,7493 v1(13829,7468) 13904.29,7392.71 14020.48,7392.71 ; 13756.36,7493 cw(c13756.36,7467.54) R32.2@13774.36,7485.54 ; 13758.22,7493 ccw(c13758.22,7515.82) R32.2@13774.36,7499.69 ; v1@13760.23,7990.77 ccw(c13717.34,8033.66) 13778,8033.66 ; v1(13762,7989) 13763,7989 13778,8004 13778,8286 13818.61,8326.61 R2.2@13818.61,8423.24 ; R32.2@13781.43,7500.61 cw(c13781.43,7464.52) 13806.96,7490.04 ; C4.1@13784.36,7221.08 ccw(c13767.29,7204) 13767.29,7228.15 ccw(c13767.29,7252.29) C4.1@13784.36,7235.22 ; C4.1@13798.51,7221.08 cw(c13815.58,7204) 13815.58,7228.15 cw(c13815.58,7252.29) C4.1@13798.51,7235.22 ; R2.2@13811.54,8416.17 cw(c13794.47,8399.1) 13818.61,8399.1 cw(c13842.76,8399.1) R2.2@13825.69,8416.17 ; R11.1@13812.08,8479.04 cw(c13795.01,8461.97) 13819.15,8461.97 cw(c13843.3,8461.97) R11.1@13826.22,8479.04 ; R2.2@13812.54,8430.31 ccw(c13796.59,8446.27) 13819.15,8446.27 ; R2.2@13819.15,8423.78 R11.1@13819.15,8486.11 ; 13819.15,8448.5 ccw(c13844.87,8448.5) R2.2@13826.69,8430.31 ; 13985.06,7244.11 ccw(c13946.7,7282.47) J1.2@14000.95,7282.47 ; 13992.16,7251.22 cw(c14020.48,7222.9) J1.2@14020.48,7262.94 ; D5.2@14005.81,7553.99 cw(c13969.8,7517.98) 14020.72,7517.98 ; J1.2@14006.67,7296.28 ccw(c13973.33,7329.61) 14020.48,7329.61 ccw(c14067.62,7329.61) J1.2@14034.28,7296.28 ; C5.1@14010.11,7439.88 cw(c13985.1,7414.87) 14020.48,7414.87 ; C5.1@14010.11,7471.09 ccw(c13984.51,7496.7) 14020.72,7496.7 ccw(c14056.93,7496.7) C5.1@14031.33,7471.09 ; J1.2@14020.48,7279.53 13969.09,7228.15 C4.1@13791.43,7228.15 13697.15,7228.15 U3.6@13697,7228 13578,7228 ; J1.2@14020.48,7282.47 14020.48,7392.71 ; 14020.48,7413.68 cw(c14057.53,7413.68) C5.1@14031.33,7439.88 ; C5.1@14020.48,7455.24 14020.48,7392.71 ; C5.1@14020.72,7455.49 D5.2@14020.72,7567.36 ; 14020.72,7521.72 cw(c14066.36,7521.72) D5.2@14034.09,7553.99 ; 13099,7272 13290.14,7272 13339.69,7222.45 13339.69,7195.31 13356.85,7178.15 C23.1@13382.43,7178.15 13471.85,7178.15 U3.2@13472,7178 13559,7178 13578,7197 13578,7228
VMID: C10.1 R19.2 U2.22 | length 528.1
  Bottom Layer w10: R19.2@14594.14,7846.65 ccw(c14559.99,7880.8) 14608.28,7880.8 ccw(c14656.56,7880.8) R19.2@14622.42,7846.65 ; C10.1@14597.25,7895.83 cw(c14570.62,7869.2) 14608.28,7869.2 ; R19.2@14608.28,7827.51 C10.1@14608.28,7906.01 ; 14608.28,7871.25 cw(c14643.04,7871.25) C10.1@14618.46,7895.83 ; R19.2@14609.77,7829 U2.22@14787.05,7829 ; R19.2@14615.35,7820.44 cw(c14636.01,7799.78) 14636.01,7829 ; R19.2@14622.42,7813.37 cw(c14660.15,7775.64) 14660.15,7829 ; R19.2@14622.42,7841.65 ccw(c14652.97,7872.2) 14652.97,7829 ; U2.22@14751.89,7821.4 ccw(c14733.54,7803.05) 14733.54,7829 ccw(c14733.54,7854.95) U2.22@14751.89,7836.6
WP: R27.1 U5.7 | length 178.7
  Bottom Layer w10: R27.1@13062.57,8122.85 U5.7@13157.85,8122.85 ; R27.1@13073.17,8112.25 cw(c13098.78,8086.64) 13098.78,8122.85 cw(c13098.78,8159.07) R27.1@13073.17,8133.46 ; 13113.33,8122.85 ccw(c13113.33,8143.67) U5.7@13128.05,8128.95 ; 13118.87,8122.85 cw(c13118.87,8109.87) U5.7@13128.05,8119.05
pads on no net: U1.4 U2.19 U4.3 U4.7 U5.3 V1.

## Polygon pours and split planes (outlines as drawn)
GND on Top Layer "Top Layer-No Net" (hatched 90Degree grid 10 track 10, remove dead copper): 12813.49,9493 12819.49,9487 12819.49,6955 15658.49,6955 15693.49,6990 15658.49,7025 15658.49,9360
GND on Bottom Layer "Top Layer-No Net" (hatched 90Degree grid 10 track 10, remove dead copper): 12785.67,9357 12785.67,6919 12723.67,6857 12756.67,6824 15778.67,6824 16065.67,6824 16185.67,6944 16128.67,7001 16128.67,9238

## Keep-outs
Keep-Out Layer:
  circle w5: c13295.6,8443.13 r62.99
  circle w5: c15145.99,8443.13 r62.99
  circle w2.5: c13321.19,7214.79 r1.25
  circle w2.5: c13321.19,7112.42 r1.25
  lines w5: 13089.76,7214.79 13313.32,7214.79 ; 12972.76,7214.79 13321.19,7214.79 13321.19,7010.06 15120.4,7010.06 15120.4,7214.79 15468.83,7214.79 15468.83,8758.09 14878.28,8758.09 14878.28,9230.54 13563.32,9230.54 13563.32,8758.09 12972.76,8758.09 12972.76,7214.79

## Silkscreen, mask and mechanical layers (free items; w line width, h text height)
Top Overlay:
  circle w2.5: c15120.4,7010.06 r1.25
  circle w5: c13393.69,7738.41 r236.22
  circle w5: c13393.69,7738.41 r39.37
  circle w2.5: c14083.47,8797.47 r1.25
  circle w2.5: c15120.4,7010.06 r1.25
  lines w5: 13846.78,7010.06 cw(c13846.78,7128.17) 13728.67,7128.17 13728.67,8092.74 cw(c13846.78,8092.74) 13846.78,8210.85 14594.81,8210.85 cw(c14594.81,8092.74) 14712.92,8092.74 14712.92,7128.17 cw(c14594.81,7128.17) 14594.81,7010.06 ; 14023.95,8935.26 14023.95,9092.74 14417.65,9092.74 14417.65,8935.26 14023.95,8935.26 ; 14142.06,8718.72 14299.54,8718.72 14299.54,8876.21 14142.06,8876.21 14142.06,8718.72
Bottom Overlay:
  text "Ver 1.0" at 15318,8340 h60 r90
  text "2011-01-06" at 15414,8185 h60 r90

## Text inside footprints (layer, text, board x,y; h text height)
D2: Top Overlay "+" at 13860,9175 h30 r270
D3: Top Overlay "+" at 13721,8895 h30 r90
J1: Bottom Overlay "1" at 13936.81,7357.27 h27.56 r180
LS1: Top Overlay "+" at 13223.76,7678.45 h31.5
P1: Bottom Overlay "1" at 14497.9,7051.7 h27.56
P5: Top Overlay "1" at 14171.59,7239.81 h27.56
V1: Bottom Overlay "+" at 14668.27,8716.87 h39.37